# Altium PCB MB672.PCBDOC (part 4 of 4)
Units mil, origin at the board's own origin, x right, y up, seen from the top; angles counter-clockwise.
Board outline 4505 x 6805 mil, 4 copper layers (TopLayer, GND, VCC, BottomLayer); 337 components, 289 nets, 1516 pads, 621 vias.
Unrouted connection lines stored in the file: 28.
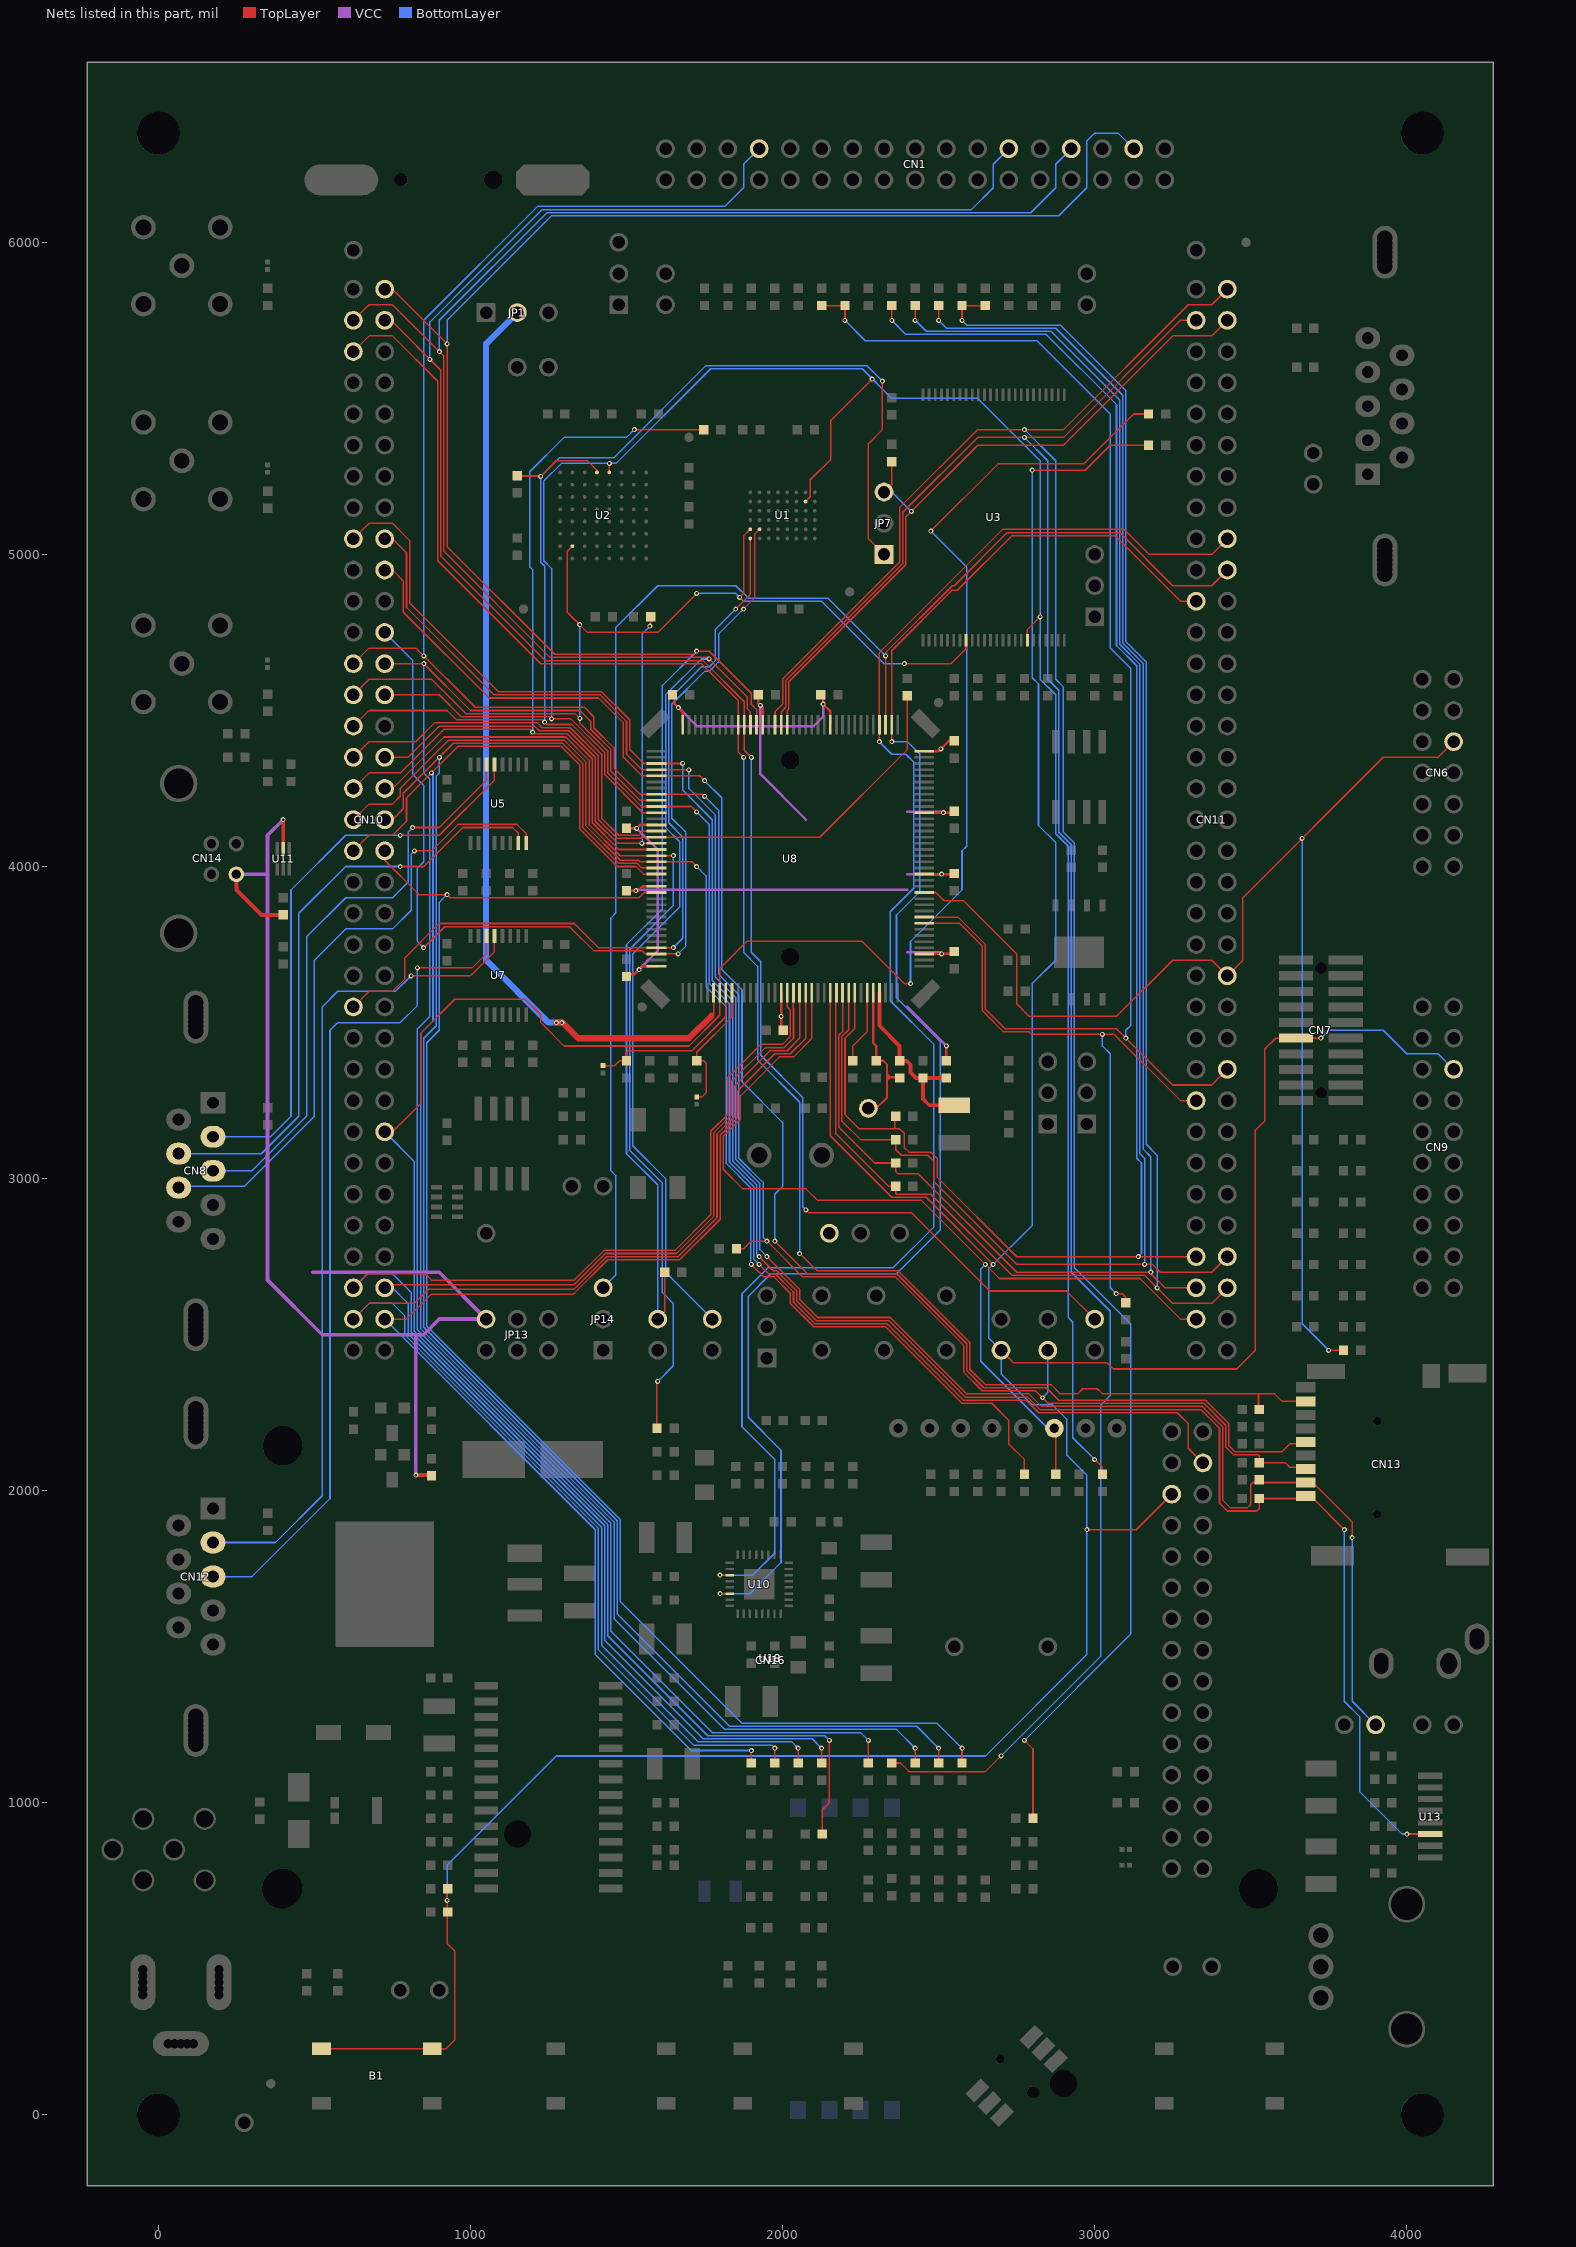
[diagram p6: the nets of this part, all layers, seen from the top]

## Via types
v1: diameter 16, hole 8, TopLayer to BottomLayer, tented both sides, 621 vias

## Nets (pads, with @x,y where several pads share a name; then routed paths per layer and width w, separated by ;. In a path a pad name is that pad's centre, name@x,y a point inside that pad or via, vN(x,y) a via of type N, cw(c..) or ccw(c..) an arc to the next point about the centre after c; other vN are vias at no path point) (continued)
PB13: CN11.21 U8.74 U10.14 | length 5093.3
  TopLayer w5: v1(1800,1670) 1800.47,1670.47 U10.14@1830.51,1670.47 ; v1(2350,4400) 2350,4453.94 U8.74@2349.8,4454.13 2349.8,4691.66 2543.14,4885 2560,4885 2735,5060 3065,5060 3275,4850 CN11.21@3325,4850
  BottomLayer w5: v1(1800,1670) 1895,1670 1995,1770 1995,2130 1890,2235 1890,2622.57 1962.43,2695 2365,2695 2505,2835 2505,3439.14 2365,3579.14 2365,3845 2440,3920 2440,4360 2400,4400 v1(2350,4400)
PB14: CN11.20 JP14.3 U8.75 | length 4735.2
  TopLayer w5: v1(2330,4675) 2330,4686 2544,4900 2550,4900 2720,5070 3080,5070 3250,4900 3375,4900 CN11.20@3425,4950 ; U8.75@2330.12,4454.13 v1@2330.12,4675
  BottomLayer w5: JP14.3@1425,2650 1465,2690 1465,3010 1450,3025 1450,3835 1465,3850 1465,4765 1600,4900 1850,4900 1890,4860 2145,4860 v1(2330,4675)
PB15: CN11.18 U8.76 U10.11 | length 5147.1
  TopLayer w5: v1(1799.53,1729.53) U10.11@1830.51,1729.53 ; v1(2310,4400) 2310,4453.7 U8.76@2310.43,4454.13 2310.43,4685.43 2705,5080 3095,5080 3175,5000 3375,5000 CN11.18@3425,5050
  BottomLayer w5: v1(1799.53,1729.53) 1904.53,1729.53 1975,1800 1975,2100 1870,2205 1870,2630.86 1954.14,2715 2355,2715 2485,2845 2485,3430 2345,3570 2345,3855 2420,3930 2420,4335 2395,4360 2350,4360 v1(2310,4400)
PC0: C7.2 CN11.66 R6.2 R63.2 U8.26 | length 5620
  TopLayer w5: U8.26@2170,3593.23 2170,3145 2340,2975 R63.2@2362.5,2975 2362.5,2952.5 2365,2950 2475,2950 2735,2690 3160,2690 3250,2600 3375,2600 CN11.66@3425,2650 ; v1(2575,5750) R6.2@2575,5797.5 C7.2@2650,5797.5
  BottomLayer w5: v1(2575,5750) 2590,5735 2890,5735 3100,5525 3100,4720.71 3165,4655.71 3165,3110 3200,3075 v1(3200,2650)
PC1: C22.2 CN11.65 R5.1 U8.27 | length 5397.5
  TopLayer w5: U8.27@2192.32,3595.87 2192.32,3471.46 2180,3459.14 2180,3165 2295,3050 C22.2@2362.5,3050 2362.5,3022.5 2370,3015 2435,3015 2750,2700 v1(3180,2700) 3180,2695 3225,2650 CN11.65@3325,2650 ; v1(2500,5750) R5.1@2500,5797.5
  BottomLayer w5: v1(2500,5750) 2525,5725 2875,5725 3090,5510 3090,4716.57 3155,4651.57 3155,3095 3180,3070 v1(3180,2700)
PC2: C13.2 CN11.64 R4.1 U8.28 | length 5545
  TopLayer w5: U8.28@2212.01,3595.87 2212.01,3477.01 2190,3455 2190,3185 2250,3125 C13.2@2362.5,3125 2362.5,3092.5 2380,3075 2465,3075 2485,3055 2485,2990 2750,2725 3185,2725 3210,2700 3375,2700 CN11.64@3425,2750 ; v1(2425,5750) R4.1@2425,5797.5
  BottomLayer w5: v1(2425,5750) 2460,5715 2860,5715 3080,5495 3080,4712.43 3145,4647.43 3145,3080 3160,3065 v1(3160,2725)
PC3: C9.2 CN11.63 R3.1 U8.29 | length 5463.1
  TopLayer w5: U8.29@2231.69,3595.87 2231.69,3481.69 2200,3450 2200,3205 2245,3160 2375,3160 2390,3145 2390,3100 2405,3085 2475,3085 2495,3065 2495,3005 2750,2750 CN11.63@3325,2750 ; v1(2350,5750) R3.1@2350,5797.5 ; 2360,3160 C9.2@2360,3197.5
  BottomLayer w5: v1(2350,5750) 2395,5705 2845,5705 3070,5480 3070,4708.28 3135,4643.28 3135,3065 3150,3050 3150,2760 v1(3140,2750)
PC4: CN11.53 R126.1 U8.44 | length 2132.1
  TopLayer w5: U8.44@2454.13,3818.31 2566.69,3818.31 2640,3745 2640,3538.28 2708.28,3470 2790,3470 2798,3462 3063,3462 3275,3250 CN11.53@3325,3250 ; v1(3068.5,2631.5) 3088.5,2631.5 3100,2620 R126.1@3100,2602.5 R126.1@3097.5,2602.5
  BottomLayer w5: v1(3025,3462) 3025,3425 3050,3400 3050,2650 v1(3068.5,2631.5)
PC5: C6.2 CN11.52 R1.2 U8.45 | length 4465.9
  TopLayer w5: R1.2@2125,5797.5 C6.2@2200,5797.5 v1(2200,5750) ; U8.45@2454.13,3837.99 2562.01,3837.99 2650,3750 2650,3542.43 2712.43,3480 3070,3480 3250,3300 3375,3300 CN11.52@3425,3350
  BottomLayer w5: v1(2200,5750) 2265,5685 2815,5685 3050,5450 3050,4700 3115,4635 3115,3490 3100,3475 v1(3100,3450)
PC6: CN1.3 CN10.2 JP15.1 R56.2 U8.96 | length 7269.3
  TopLayer w5: CN10.2@725,5850 750,5850 v1(925,5675) 925,5025 1270,4680 1715,4680 v1(1725,4690) 1765,4690 1900,4555 1900,4520 1916.73,4503.27 U8.96@1916.73,4454.13 ; JP15.1@1600,2550 1622.5,2572.5 R56.2@1622.5,2700
  BottomLayer w5: v1(925,5675) 925,5750 1260,6085 2885,6085 2975,6175 2975,6325 3000,6350 3075,6350 CN1.3@3125,6300 ; JP15.1@1600,2555 1600,2980 1500,3080 1500,3750 1615,3865 1615,4580 v1(1725,4690)
PC7: CN1.7 CN10.3 JP16.1 U8.97 | length 7033.7
  TopLayer w5: CN10.3@625,5750 675,5800 750,5800 915,5635 915,5010 1255,4670 1760,4670 1887.36,4542.64 1887.36,4505 1897.05,4495.32 U8.97@1897.05,4454.13
  BottomLayer w5: v1(900,5650) 900,5750 1245,6095 2795,6095 2875,6175 2875,6250 CN1.7@2925,6300 ; v1(1765,4665) 1740,4665 1625,4550 1625,4125 1670.44,4079.56 1670.44,3870.44 1520,3720 1520,3105 1625,3000 1625,2700 JP16.1@1775,2550
PC8: CN1.11 CN10.4 JP17.1 U8.98 | length 7035.5
  TopLayer w5: CN10.4@725,5750 745,5750 905,5590 905,4995 1240,4660 1745,4660 1877.36,4527.64 1877.36,4372.64 v1(1900,4350) ; v1(2075,2900) 2085,2890 2414.14,2890 2664.14,2640 2910,2640 JP17.1@3000,2550
  BottomLayer w5: v1(870,5625) 870,5745 1025,5900 1056.28,5931.28 1230,6105 2605,6105 2675,6175 2675,6250 CN1.11@2725,6300 ; v1(1900,4350) 1900,3725 1930,3695 1930,3395 2065,3260 2065,2910 v1(2075,2900)
PC9: CN10.5 CN13.8 R131.2 U8.99 | length 5857.6
  TopLayer w5: CN10.5@625,5650 675,5700 750,5700 895,5555 895,4980 1225,4650 1740,4650 1857.68,4532.32 1857.68,4367.32 v1(1875,4350) ; v1(2055,2760) 2110,2705 2370,2705 2600,2475 2600,2389.14 2649.14,2340 2860,2340 2890,2310 2945,2310 2961.84,2326.84 3008.16,2326.84 3025,2310 3576.22,2310 3600,2286.22 CN13.8@3676.65,2286.22 ; R131.2@3525,2262.5 3525,2310
  BottomLayer w5: v1(1875,4350) 1875,3725 1920,3680 1920,3380 2055,3245 v1(2055,2760)
PC10: CN10.17 CN13.1 R132.2 U8.111 U13.3 | length 6840
  TopLayer w5: CN10.17@625,5050 675,5100 750,5100 805,5045 805,4845 1090,4560 1420,4560 1510,4470 1510,4375.12 1555,4330.12 v1(1680.12,4330.12) ; v1(1925,2750) 1970,2705 1980.86,2705 2045,2640.86 2045,2608.28 2108.28,2545 2340,2545 2585,2300 2785,2300 2825,2260 3340,2260 3400,2200 3400,1960 3425,1935 3520,1935 3527.5,1942.5 R132.2@3527.5,1975 3700,1975 v1(3800,1875) ; v1(4000,900) 4074.8,900 U13.3@4075,899.8
  BottomLayer w5: v1(1680.12,4330.12) 1680.12,4244.88 1775,4150 1775,3635 1840,3570 1840,3056.72 1917.5,2979.22 1917.5,2757.5 v1(1925,2750) ; v1(3800,1875) 3800,1325 3850,1275 3850,1035 3985,900 v1(4000,900)
PC11: CN10.18 CN13.2 JP22.1 R133.2 U8.112 | length 6279.5
  TopLayer w5: CN10.18@725,5050 750,5050 795,5005 795,4830 1075,4550 1415,4550 1500,4465 1500,4360 1549.57,4310.43 1699.57,4310.43 v1(1700,4310) ; v1(1950,2750) 2055,2645 2055,2612.43 2112.43,2555 2345,2555 2590,2310 2790,2310 2830,2270 3345,2270 3410,2205 3410,1970 3435,1945 3490,1945 3500,1955 3500,2020 3506.38,2026.38 3698.62,2026.38 3825,1900 v1(3825,1850)
  BottomLayer w5: v1(1700,4310) 1700,4250 1785,4165 1785,3645 1850,3580 1850,3060.86 1927.5,2983.36 1927.5,2772.5 v1(1950,2750) ; v1(3825,1850) 3825,1325 JP22.1@3900,1250
PC12: CN10.20 CN13.5 U8.113 | length 5102.8
  TopLayer w5: CN10.20@725,4950 750,4950 785,4915 785,4815 1060,4540 1410,4540 1490,4460 1490,4350 1549.25,4290.75 1734.25,4290.75 v1(1750,4275) ; v1(1975,2800) 2080,2695 2365.86,2695 2590,2470.86 2590,2385 2645,2330 2845,2330 2885,2290 3355,2290 3430,2215 3430,2145 3450,2125 3600,2125 3625,2150 CN13.5@3680,2150
  BottomLayer w5: v1(1750,4275) 1805,4220 1805,3670 1870,3605 1870,3310 2000,3180 2000,2975 1975,2950 v1(1975,2800)
PC13: CN10.56 R11.1 R111.2 U8.7 | length 7846.4
  TopLayer w5: CN10.56@725,3150 750,3150 840,3240 840,3465 950,3575 1175,3575 1225,3525 1225,3500 1300,3425 1700,3425 1798.62,3523.62 1798.62,3673.62 1885,3760 2255,3760 2390,3625 v1(2410,3625) ; R111.2@2127.5,900 2127.5,977.5 2150,1000 v1(2150,1200) ; v1(2475,5075) 2690,5290 2965,5290 3125,5450 R11.1@3172.5,5450
  BottomLayer w5: CN10.56@725,3150 820,3055 820,2511.57 1440,1891.57 1440,1535 1760,1215 2135,1215 v1(2150,1200) ; v1(2410,3625) 2410,3760 2575,3925 2575,4050 2590,4065 2590,4960 v1(2475,5075)
PC14: JP9.1 R135.2 U8.8 | length 551.8
  TopLayer w5: JP9.1@1425,3361.81 1461.81,3361.81 1477.5,3377.5 R135.2@1500,3377.5 1500,3405 1505,3410 1710,3410 1818.31,3518.31 U8.8@1818.31,3595.87
PC15: JP10.2 R39.2 U8.9 | length 428.7
  TopLayer w5: JP10.2@1725,3261.81 1741.81,3261.81 1755,3275 1755,3370 1747.5,3377.5 R39.2@1725,3377.5 1725,3405 1837.99,3517.99 U8.9@1837.99,3595.87
PD2: C60.2 CN1.27 CN10.25 CN13.3 JP20.1 R134.2 U8.116 | length 7723.2
  TopLayer w5: CN10.25@625,4650 675,4700 825,4700 1015,4510 1365,4510 1395,4480 1395,4445 1460,4380 1460,4315 1543.31,4231.69 1743.31,4231.69 v1(1750,4225) ; C60.2@1852.5,2775 1875,2775 1900,2800 v1(1950,2800) 2065,2685 2361.72,2685 2580,2466.72 2580,2380 2640,2320 2810.74,2320 2850.74,2280 3350,2280 3420,2210 3420,2140 3445,2115 3525,2115 3527.5,2112.5 R134.2@3527.5,2090 3610,2090 3625,2075 CN13.3@3670,2075
  BottomLayer w5: v1(850.35,4674.65) 850.35,5750.35 1215,6115 1815,6115 1875,6175 1875,6250 CN1.27@1925,6300 ; v1(1750,4225) 1795,4180 1795,3655 1860,3590 1860,3065 1937.5,2987.5 1937.5,2812.5 v1(1950,2800) ; v1(2832.87,2297.87) 2850,2315 JP20.1@2850,2450
PD3: CN10.26 R100.2 U8.117 | length 5532.8
  TopLayer w5: CN10.26@725,4650 v1@850,4650 ; v1(850.35,4650.35) v1@850,4650 ; U8.117@1595.87,4212.01 1542.99,4212.01 1450,4305 1450,4375 1385,4440 1385,4465 1350,4500 1000,4500 v1@850,4650 ; R100.2@2275,1127.5 v1(2275,1200)
  BottomLayer w5: v1(850.35,4650.35) 850.35,4299.65 870,4280 870,3520 830,3480 830,2515.71 1450,1895.71 1450,1550 1775,1225 2250,1225 v1(2275,1200)
PD4: CN10.27 CN16.4 U1.A2 U2.G2 U3.8 U8.118 | length 6877.7
  TopLayer w5: CN10.27@625,4550 675,4600 875,4600 985,4490 1335,4490 v1(1350.36,4474.64) 1350.36,4459.64 1440,4370 1440,4300 1547.68,4192.32 1707.68,4192.32 v1(1725,4175) ; U2.G2@1326.57,5026.57 1310,5010 1310,4815 1375,4750 1600,4750 v1(1725,4875) ; v1(1862.61,4862.39) 1875,4874.78 1875,5059.06 U1.A2@1896.65,5080.71 ; v1(1925,2725) 1955,2695 1976.72,2695 2035,2636.72 2035,2604.14 2104.14,2535 2335,2535 2580,2290 2780.86,2290 2820.86,2250 3265,2250 3300,2215 3300,2136 CN16.4@3347,2089 ; v1(2390,4650) 2540,4650 2587.8,4697.8 U3.8@2587.8,4725
  BottomLayer w5: v1@1350,4475 v1(1350,4775) ; v1(1725,4175) 1765,4135 1765,3625 1830,3560 1830,3052.57 1907.5,2975.07 1907.5,2742.5 v1(1925,2725) ; v1(1725,4875) 1850,4875 1875,4850 2125,4850 2325,4650 v1(2390,4650)
PD5: CN10.28 R80.1 U1.G5 U2.A5 U3.18 U8.119 | length 7633.3
  TopLayer w5: CN10.28@725,4550 900,4550 970,4480 1253,4480 v1(1260,4473) 1322,4473 1430,4365 1430,4295 1552.36,4172.64 U8.119@1595.87,4172.64 ; U2.A5@1444.68,5262.8 v1@1444.68,5291.21 ; U1.G5@2073.82,5169.29 2089,5184.47 2089,5239 2155,5305 2155,5430 v1(2286.99,5561.99) ; U3.18@2784.65,4725 2784.65,4759.65 v1(2825,4800) ; v1(3000,2100) 3025,2075 R80.1@3025,2052.5
  BottomLayer w5: v1(1260,4473) 1260,4955 1235,4980 1235,5235 1291.52,5291.52 1466.52,5291.52 1770,5595 2255,5595 2350,5500 2625,5500 2825,5300 2825,4600 2875,4550 2875,4105 2915,4065 2915,2555 2930,2540 2930,2170 v1(3000,2100)
  other v1: 1445,5291.52
PD6: CN10.29 JP7.1 R18.1 U2.A4 U8.122 | length 4225.9
  TopLayer w5: CN10.29@625,4450 675,4500 925,4500 955,4470 1230,4470 1245,4455 1325,4455 1420,4360 1420,4155 1475,4100 1540,4100 1553.58,4113.58 U8.122@1595.87,4113.58 ; R18.1@1151.14,5251.36 v1@1223.64,5251.36 ; v1(1225,5250) 1275,5300 1375,5300 1405.31,5269.69 U2.A4@1405.31,5262.8 ; v1(2320,5555) 2320,5400 2275,5355 2275,5050 JP7.1@2325,5000
  BottomLayer w5: v1(1237.61,4462.39) 1237.61,4962.39 1225,4975 v1(1225,5250) 1285,5310 1460,5310 1755,5605 2270,5605 v1(2320,5555)
PD7: CN10.31 R22.1 U8.123 | length 2384.5
  TopLayer w5: CN10.31@625,4350 675,4400 825,4400 885,4460 1215,4460 1230,4445 1320,4445 1410,4355 1410,4150 1470,4090 1550,4090 1553.9,4093.9 2118.9,4093.9 2400,4375 R22.1@2400,4547.5
PE0: CN10.47 U1.A1 U8.141 | length 2673.6
  TopLayer w5: CN10.47@625,3550 675,3600 750,3600 790,3640 790,3708 899.36,3817.36 1332.64,3817.36 1410.43,3739.57 U8.141@1595.87,3739.57 1596.3,3740 v1(1650,3740) ; v1(1850,4825) 1896.65,4871.65 U1.A1@1896.65,5051.18
  BottomLayer w5: v1(1650,3740) 1680.44,3770.44 1680.44,4094.56 1635,4140 1635,4535 1740,4640 1765,4640 1785,4660 1785,4760 v1(1850,4825)
PE1: CN10.24 U1.B2 U8.142 | length 3472.9
  TopLayer w5: v1(850,3740) 917.36,3807.36 1317.64,3807.36 1395.43,3729.57 1550.43,3729.57 1560.12,3719.88 v1(1665,3719.88) ; v1(1875,4825) 1910.47,4860.47 1910.47,5065 U1.B2@1926.18,5080.71
  BottomLayer w5: CN10.24@725,4750 815,4660 815,4295 850,4260 850,4015 830,3995 830,3760 v1(850,3740) ; v1(1665,3719.88) 1690.44,3745.33 1690.44,4109.56 1645,4155 1645,4520 1750,4625 1765,4625 1795,4655 1795,4745 v1(1875,4825)
PF6: CN10.65 R96.2 U8.18 | length 4606.2
  TopLayer w5: CN10.65@625,2650 670,2695 855,2695 875,2675 1332.57,2675 1427.57,2770 1655,2770 1770,2885 1770,3151.57 1825,3206.57 1825,3325 1930,3430 2000,3430 2025,3455 2025,3540 2015.16,3549.84 U8.18@2015.16,3595.87 ; R96.2@2125,1127.5 v1(2125,1175)
  BottomLayer w5: CN10.65@625,2650 670,2695 750,2695 810,2635 810,2507.43 1430,1887.43 1430,1520 1745,1205 2095,1205 v1(2125,1175)
PF7: CN10.66 R97.2 U8.19 | length 4268.7
  TopLayer w5: CN10.66@725,2650 735,2660 1331.72,2660 1431.72,2760 1660,2760 1780,2880 1780,3147.43 1835,3202.43 1835,3310 1945,3420 2005,3420 2035,3450 2035,3545 2034.84,3545.16 U8.19@2034.84,3595.87 ; R97.2@2050,1127.5 v1(2050,1175)
  BottomLayer w5: CN10.66@725,2650 750,2650 800,2600 800,2503.28 1420,1883.28 1420,1505 1730,1195 2030,1195 v1(2050,1175)
PF8: CN10.67 R98.2 U8.20 | length 4434.3
  TopLayer w5: CN10.67@625,2550 675,2600 820,2600 865,2645 1330.86,2645 1435.86,2750 1665,2750 1790,2875 1790,3143.28 1845,3198.28 1845,3295 1960,3410 2015,3410 2054.53,3449.53 U8.20@2054.53,3595.87 ; R98.2@1975,1127.5 v1(1975,1175)
  BottomLayer w5: CN10.67@625,2550 675,2600 750,2600 790,2560 790,2499.14 1410,1879.14 1410,1490 1715,1185 1965,1185 v1(1975,1175)
PF9: CN10.68 R99.2 U8.21 | length 4098.3
  TopLayer w5: CN10.68@725,2550 795,2550 875,2630 1330,2630 1440,2740 1670,2740 1800,2870 1800,3139.14 1855,3194.14 1855,3280 1975,3400 2025,3400 2074.21,3449.21 U8.21@2074.21,3595.87 ; R99.2@1900,1127.5 v1(1900,1167.52)
  BottomLayer w5: CN10.68@725,2550 1400,1875 1400,1475 1707.48,1167.52 v1(1900,1167.52)
PF10: CN11.67 R78.1 U8.22 U18.6 | length 3208.5
  TopLayer w5: U8.22@2093.9,3595.87 2093.9,3448.9 2035,3390 1990,3390 1865,3265 1865,3190 1810,3135 1810,3030 1872.93,2967.07 2075.36,2967.07 2112.43,2930 2445,2930 2695,2680 3145,2680 3275,2550 CN11.67@3325,2550 ; R78.1@2875,2052.5 U18.6@2875,2196.06
  BottomLayer w5: v1(2650,2725) 2635,2710 2635,2415 2850,2200 U18.6@2871.06,2200
PF11: CN6.9 CN11.46 R129.1 U8.49 | length 4198.7
  TopLayer w5: U8.49@2454.13,3916.73 2490.94,3916.73 2502.65,3905.03 ; 2503.36,3904.32 2517.68,3890 2580,3890 2750,3720 2750,3560 2790,3520 3070,3520 3250,3700 3375,3700 CN11.46@3425,3650 3475,3700 3475,3900 3925,4350 4100,4350 CN6.9@4150,4400 ; v1(3750,2450) R129.1@3797.5,2450
  BottomLayer w5: v1(3665,4090) 3665,2535 v1(3750,2450)
PG6: CN11.4 JP7.3 R17.1 U8.91 | length 2335.5
  TopLayer w5: U8.91@2015.16,4454.13 2015.16,4500.16 2020,4505 2020,4591.72 2395,4966.72 2395,5120 2625,5350 2900,5350 3250,5700 3375,5700 CN11.4@3425,5750 ; JP7.3@2325,5200 2350,5225 R17.1@2350,5297.5
  BottomLayer w5: JP7.3@2325,5200 2350,5200 2412.38,5137.62 v1(2412.62,5137.62)
PG7: CN11.3 R101.2 U8.92 | length 6902.9
  TopLayer w5: U8.92@1995.47,4454.13 1995.47,4495.47 2010,4510 2010,4595.86 2385,4970.86 2385,5135 2625,5375 2900,5375 3275,5750 CN11.3@3325,5750 ; R101.2@2350,1127.5 2377.5,1127.5 2405,1100 2650,1100 v1(2700,1150)
  BottomLayer w5: v1(2700,1150) 3020,1470 3020,2275 3050,2305 3050,2575 2925,2700 2925,4070 2885,4110 2885,4565 2850,4600 2850,5300 v1(2775,5375)
PG8: CN11.2 R106.2 U8.93 | length 6944.2
  TopLayer w5: U8.93@1975.79,4454.13 1975.79,4495.79 2000,4520 2000,4600 2375,4975 2375,5150 2625,5400 2900,5400 3300,5800 3375,5800 CN11.2@3425,5850 ; v1(2775,1200) 2802.5,1172.5 R106.2@2802.5,950
  BottomLayer w5: v1(2775,1200) 3115,1540 3115,2535 2935,2715 2935,4075 2900,4110 2900,4575 2875,4600 2875,5300 v1(2775,5400)
PG9: CN10.32 R21.1 U8.124 | length 1923.5
  TopLayer w5: CN10.32@725,4350 800,4350 900,4450 1205,4450 1220,4435 1315,4435 1400,4350 1400,4145 1470.79,4074.21 v1@1548,4074.21 ; v1@1548.88,4074.21 U8.124@1595.87,4074.21 ; v1(1575,4770) 1577.5,4772.5 R21.1@1577.5,4800
  BottomLayer w5: v1@1550,4075 1550,4745 v1(1575,4770)
  other v1: 1548.88,4073.88
PG10: CN10.33 R15.1 U8.125 | length 2781.3
  TopLayer w5: CN10.33@625,4250 675,4300 775,4300 915,4440 1190,4440 1205,4425 1310,4425 1390,4345 1390,4140 1475.47,4054.53 U8.125@1595.87,4054.53 ; v1(1525,5400) R15.1@1747.5,5400
  BottomLayer w5: v1(1199.04,4430.96) 1200,4431.92 1200,4950 1190,4960 1190,5265 1300,5375 1500,5375 v1(1525,5400)
PG11: CN10.34 R128.2 U8.126 | length 3243.7
  TopLayer w5: CN10.34@725,4250 750,4250 915,4415 1305,4415 1380,4340 1380,4135 1480.16,4034.84 U8.126@1595.87,4034.84 1596.02,4035 v1(1650,4035) ; R128.2@1597.5,2200 1597.5,2347.5 v1(1600,2350)
  BottomLayer w5: v1(1600,2350) 1650,2400 1650,2600 1615,2635 1615,2985 1510,3090 1510,3735 1650,3875 v1(1650,4035)
PG12: CN10.35 R77.1 U8.127 | length 4100
  TopLayer w5: CN10.35@625,4150 675,4200 750,4200 775,4225 775,4250 930,4405 1300,4405 1370,4335 1370,4130 1480,4020 1538.28,4020 1543.13,4015.16 1709.84,4015.16 v1(1725,4000) ; v1(1900,2725) 1940,2685 1972.57,2685 2025,2632.57 2025,2600 2100,2525 2330,2525 2575,2280 2670,2280 2725,2225 2725,2150 2775,2100 R77.1@2775,2052.5
  BottomLayer w5: v1(1725,4000) 1755,3970 1755,3615 1820,3550 1820,3048.43 1897.5,2970.93 1897.5,2727.5 v1(1900,2725)
PG13: CN10.36 R103.2 U8.128 | length 5565.3
  TopLayer w5: CN10.36@725,4150 750,4150 785,4185 785,4235 945,4395 1295,4395 1360,4330 1360,4125 1475,4010 1534.14,4010 1548.67,3995.47 U8.128@1595.87,3995.47 ; R103.2@2500,1127.5 v1(2500,1175)
  BottomLayer w5: v1(900,4350) 900,4300 890,4290 890,3490 850,3450 850,2524 1470,1904 1470,1605 1830,1245 2430,1245 v1(2500,1175)
PG14: CN10.37 R102.2 U8.129 | length 5613
  TopLayer w5: CN10.37@625,4050 675,4100 750,4100 795,4145 795,4220 960,4385 1290,4385 1350,4325 1350,4120 1470,4000 1530,4000 1554.21,3975.79 U8.129@1595.87,3975.79 ; R102.2@2425,1127.5 v1(2425,1175)
  BottomLayer w5: v1(875,4300) 880,4295 880,3505 840,3465 840,2519.85 1460,1899.85 1460,1590 1815,1235 2365,1235 v1(2425,1175)
PG15: CN10.38 R104.2 U8.132 | length 4843.4
  TopLayer w5: CN10.38@725,4050 725,4020 835,3910 v1(925,3910) 935,3900 1540,3900 1556.73,3916.73 U8.132@1595.87,3916.73 ; R104.2@2575,1127.5 v1(2575,1175)
  BottomLayer w5: v1(925,3910) 900,3885 900,3475 860,3435 860,2528.14 1480,1908.14 1480,1645 1870,1255 2495,1255 v1(2575,1175)
RESET#: B1.2 B1.3 C94.2 CN7.10 CN9.15 CN16.5 JP19.2 R14.2 R119.1 U8.25 | length 11857.3
  TopLayer w5: B1.2@522.83,212.5 922.5,212.5 950,240 950,525 925,550 R119.1@925,722.5 ; U8.25@2152.95,3595.87 2152.95,3137.05 2350,2940 2460,2940 v1(2675,2725) ; JP19.2@2700,2450 2740,2410 3039.85,2410 3059.85,2390 3455,2390 3515,2450 3515,3155 3545,3185 3545,3415 3580,3450 v1(3725,3450) ; v1(2800,5270) 2970,5270 3050,5350 R14.2@3172.5,5350 ; v1(2975,1875) 3133,1875 CN16.5@3247,1989
  BottomLayer w5: v1(925,687.5) 925,800 1275,1150 2650,1150 2975,1475 2975,2050 2910,2115 2910,2230 2865,2275 2800,2275 2700,2375 JP19.2@2700,2450 2660,2490 2660,2710 2800,2850 2800,3625 2875,3700 2875,4076.72 2820,4131.72 2820,4585 2800,4605 v1(2800,5270) ; v1(3725,3450) 3750,3475 3925,3475 4000,3400 4100,3400 CN9.15@4150,3350
RS232_CTS2: CN8.8 U5.8 | length 2031.4
  TopLayer w5: v1(820,4050) 875,4050 960,4135 1149.13,4135 1179.13,4105 U5.8@1179.13,4075
  BottomLayer w5: CN8.8@69,2975 275,2975 500,3200 500,3700 600,3800 750,3800 810,3860 810,4040 v1(820,4050)
RS232_RTS2: CN8.7 U5.7 | length 1941.3
  TopLayer w5: v1(775,4000) 850,4000 975,4125 1135,4125 1153.54,4106.46 U5.7@1153.54,4075
  BottomLayer w5: CN8.7@65,3080 330,3080 450,3200 450,3850 600,4000 v1(775,4000)
RS232_RX1: CN12.2 U7.13 | length 2653.3
  TopLayer w5: v1(810,3650) 1000,3650 1076.77,3726.77 U7.13@1076.77,3776.97
  BottomLayer w5: CN12.2@175,1834 375,1834 525,1984 525,3550 575,3600 760,3600 v1(810,3650)
RS232_RX2: CN8.2 U5.13 | length 1850
  TopLayer w5: v1(775,4100) 900,4100 1076.77,4276.77 U5.13@1076.77,4326.97
  BottomLayer w5: CN8.2@175,3134 359,3134 425,3200 425,3925 600,4100 v1(775,4100)
RS232_TX1: CN12.3 U7.14 | length 2707.8
  TopLayer w5: v1(830,3675) 1005,3675 1051.18,3721.18 U7.14@1051.18,3776.97
  BottomLayer w5: CN12.3@175,1725 300,1725 550,1975 550,3475 575,3500 775,3500 830,3555 v1(830,3675)
RS232_TX2: CN8.3 U5.14 | length 1875.8
  TopLayer w5: v1(815,4125) 900,4125 1051.18,4276.18 U5.14@1051.18,4326.97
  BottomLayer w5: CN8.3@175,3025 300,3025 475,3200 475,3775 600,3900 750,3900 800,3950 800,4110 v1(815,4125)
U5V: C74.2 CN14.1 JP13.2 R70.1 U11.5 | length 3830.4
  TopLayer w12: CN14.1@250,3975 250,3925 330,3845 C74.2@400,3845 ; U11.5@400,4056.3 v1(400,4150) ; v1(825,2050) R70.1@872.5,2050
  VCC w12: CN14.1@250,3975 350,3975 ; v1(400,4150) 350,4100 350,2675 525,2500 850,2500 900,2550 JP13.2@1050,2550 900,2700 495,2700 ; v1(825,2050) 825,2500
VBAT: JP1.2 U8.6 | length 3066
  TopLayer w5: 1772.54,3522.54 1778.94,3528.94 U8.6@1778.94,3595.87
  TopLayer w20: v1(1275,3500) 1295,3500 1345,3450 1700,3450 1772.54,3522.54
  BottomLayer w20: JP1.2@1150,5775 1050,5675 1050,3700 1250,3500 v1(1292.5,3500)
VDD: C17.1 C18.1 C19.1 C23.1 C25.1 C26.1 C32.1 C33.1 C35.1 C36.1 C38.1 JP12.1 L1.2 U8.17 U8.39 U8.52 U8.62 U8.72 U8.84 U8.95 U8.108 U8.121 U8.131 U8.144 | length 4043.7
  TopLayer w8: C35.1@1495,3655 1525,3655 1550.51,3680.51 U8.144@1595.87,3680.51 ; C32.1@1500,3922.5 1537.5,3922.5 1551.42,3936.42 U8.131@1595.87,3936.42 ; C25.1@1500,4122.5 v1(1532.5,4122.5) 1543.27,4133.27 U8.121@1595.87,4133.27 ; C17.1@1655,4550 1655,4520 1680.51,4494.49 U8.108@1680.51,4454.13 ; C18.1@1922.5,4550 1922.5,4522.5 1936.42,4508.58 U8.95@1936.42,4454.13 ; C38.1@1995.47,3470.47 U8.17@1995.47,3595.87 ; C19.1@2130,4550 v1(2130,4520) 2152.95,4497.05 U8.84@2152.95,4454.13 ; U8.39@2454.13,3719.88 C36.1@2542.38,3719.88 ; U8.52@2454.13,3975.79 C33.1@2548.29,3975.79 ; U8.62@2454.13,4172.64 C26.1@2547.36,4172.64 ; U8.72@2454.13,4369.49 2499.49,4369.49 2532.5,4402.5 C23.1@2550,4402.5 ; L1.2@2525,3377.5 v1(2525,3425)
  VCC w8: v1(1530,3922.5) 1532.5,3925 2400,3925 ; v1(1532.5,4122.5) 1600,4055 1600,3730 v1(1540,3670) ; v1(1666.09,4508.91) 1725,4450 2100,4450 2130,4480 v1(2130,4520) ; v1(1928.95,4516.05) 1928.95,4296.05 2075,4150 ; 2400,3550 v1(2525,3425) ; 2400,3725 2504.88,3725 v1(2510,3719.88) ; 2400,3975 2509.21,3975 v1(2510,3975.79) ; 2400,4175 2512.64,4175 v1(2515,4172.64)
  other v1: 1995.47,3519.53 2506.86,4376.86
VDDA: C46.2 C50.1 L1.1 R42.2 U8.33 | length 608.3
  TopLayer w12: U8.33@2310.43,3595.87 2310.43,3489.57 2375,3425 R42.2@2375,3377.5 2397.5,3377.5 2410,3365 2410,3340 2427.5,3322.5 L1.1@2525,3322.5 ; C46.2@2450,3322.5 2450,3255 2470,3235 C50.1@2550,3235
VREF+: C45.1 R42.1 TP3.1 U8.32 | length 520.2
  TopLayer w7: TP3.1@2275,3225 2300,3225 2335,3260 2335,3365 2322.5,3377.5 C45.1@2300,3377.5 2300,3425 2290.75,3434.25 U8.32@2290.75,3595.87 ; 2335,3315 2345,3325 2335,3335 ; 2335,3325 R42.1@2385,3325
VREF-: R41.1 U8.31 | length 237.4
  TopLayer w5: R41.1@2225,3377.5 2225,3425 2271.06,3471.06 U8.31@2271.06,3595.87
pads on no net: BT1.0 CN4.1 CN4.4 CN4.8 CN6.12 CN7.0 CN7.7 CN8.9 CN10.11 CN11.38 CN11.48 CN11.49 CN11.62 CN11.68 CN12.9 CN13.0 CN16.0 CN18.6 CN18.G0 R51.2 U1.A6 U1.E3 U1.G2 U1.H6 U2.A1 U2.A8 U2.B1 U2.C1 U2.C8 U2.D1 U2.E1 U2.F8 U2.G1 U2.G8 U2.H1 U2.H8 U4.5 U6.0 U7.7 U7.8 U7.9 U8.0 U8.106 U10.0 U10.1 U10.5 U10.12 U10.26 U10.27 U10.28 U10.29 U10.30 U13.2 U17.10 U17.25 U18.0 U19.0 X2.2 X2.3
copper on no net: | length 12020
  TopLayer w5: -225,2200 -100,2200 ; -225,2325 -100,2325 25,2325 ; -225,2450 -100,2450 25,2450 ; -120,2200 25,2200 ; -100,1950 -100,2075 ; -100,2700 -100,2575 ; -225,2075 -225,1950 25,1950 25,2075 ; -225,2075 -100,2075 ; -225,2075 -225,2575 ; -225,2575 -225,2700 20,2700 25,2700 25,2575 ; -225,2575 -100,2575 ; -100,2075 -100,2575 ; -100,2075 25,2075 ; -100,2575 25,2575 ; 25,2075 25,2575
  VCC w5: -225,2075 25,2075 ; -225,2200 25,2200 ; -225,2325 25,2325 ; -225,2450 25,2450 ; -100,1950 -100,2575 -100,2700 ; -225,2575 -225,2700 25,2700 25,2575 ; -225,2575 -225,1950 25,1950 25,2575 ; -225,2575 25,2575
  BottomLayer w5: -225,2200 -100,2200 25,2200 ; -225,2325 -100,2325 25,2325 ; -225,2450 -100,2450 25,2450 ; -100,1950 -100,2075 ; -100,2700 -100,2575 ; -225,2075 -225,1950 25,1950 25,2075 ; -225,2075 -100,2075 ; -225,2075 -225,2575 ; -225,2575 -225,2700 25,2700 25,2575 ; -225,2575 -100,2575 ; -100,2075 -100,2575 ; -100,2075 25,2075 ; -100,2575 25,2575 ; 25,2075 25,2575

## Polygon pours and split planes (outlines as drawn)
GND on TopLayer (hatched 90Degree grid 20 track 10, remove dead copper): -210,6560 4290,6560 4290,-240 -210,-240
NetC78_2 on TopLayer (hatched 90Degree grid 10 track 15, remove dead copper): -225,4475 250,4475 250,3725 -225,3725
+3V3 on VCC (hatched 90Degree grid 10 track 15, remove dead copper): -225,6575 4275,6575 4275,-225 -225,-225
+5V on VCC (hatched 90Degree grid 10 track 15, remove dead copper): 1925,6300 1925,6575 4275,6575 4275,-225 -225,-225 -225,895 450,895 635,1080 635,1660 1000,2025 1000,2490.05 1275,2490.05 1275,1925 1125,1775 1025,1775 975,1725 975,1375 1025,1325 1025,1025 775,775 775,400 1225,-50 3475,-50 4075,550 4075,1150 3900,1325 3900,2275 4200,2575 4200,3850 4150,3900 4025,3900 4025,4100 4150,4100 4150,5950 3875,6225 1920,6225 1920,6340
E5V on VCC (hatched 90Degree grid 10 track 15, remove dead copper): -220,775 400,775 650,1025 650,1650 1025,2025 1025,2425 1050,2450 1270,2450 1270,2625 815,2625 815,2000 500,1685 500,1200 375,1075 -225,1075 -225,775
D5V on VCC (hatched 90Degree grid 10 track 15, remove dead copper): 1060,2510 1200,2510 1200,2795 1050,2945 930,2945 900,2975 900,3400 825,3475 700,3475 625,3550 625,5850 775,6000 3000,6000 3125,5875 3125,4875 3400,4875 3400,5900 3105,6195 580,6195 475,6090 475,2795 565,2705 930,2705 1050,2585 1050,2515
U5V on VCC (hatched 90Degree grid 10 track 15, remove dead copper): 225,4200 450,4200 450,2800 500,2750 925,2750 1100,2575 1100,2525 950,2525 880,2455 515,2455 350,2620 250,2720 225,2745
VDD on VCC (hatched 90Degree grid 10 track 10, remove dead copper): 2200,2795 2200,3320 2225,3345 2600,3345 2600,4425 2575,4450 2375,4450 2245,4580 1475,4580 1475,3270 1885,2860 1970,2775 2200,2775
GND on BottomLayer (hatched 90Degree grid 20 track 10, remove dead copper): -230,6575 4275,6575 4275,-225 -225,-225 -225,6575

## Keep-outs
KeepOutLayer:
  lines w4: -225,1950 -225,2075 ; -225,2200 -100,2200 25,2200 ; -225,2325 -100,2325 25,2325 ; -225,2450 -100,2450 25,2450 ; -100,1950 -100,2075 ; 25,1950 25,2075 ; -225,2075 -100,2075 ; -225,2075 -225,2575 -100,2575 ; -100,2075 25,2075 ; -100,2075 -100,2575 ; -100,2575 25,2575 25,2075
  lines w5: -225,1950 25,1950 ; -225,-225 -225,6575 4275,6575 4275,2361.13 ccw(c5430.29,2115.57) 4275,1870 4275,-225 -225,-225

## Other copper
TopLayer:
  text "1" at -125,2125 h50 r90
  text "D" at -15,2115 h50 r90
VCC:
  text "3" at -125,2410 h50 r90
  text "D" at -15,2410 h50 r90
BottomLayer:
  text "4" at -125,2535 h50 r90
  text "D" at -15,2535 h50 r90
GND (plane layer: these items are gaps in the copper):
  rectangle: -250,2325 50,2725
  region: -225,2200 -225,2325 -250,2325 -250,2200
  region: 50,2200 50,2325 25,2325 25,2200
  region: 50,1930 50,2200 -250,2200 -250,1930
  lines w4: -225,1950 -225,2075 ; -225,2200 -105,2200 ; -225,2325 -100,2325 25,2325 ; -225,2450 -100,2450 25,2450 ; -105,2075 -100,2075 ; -100,1950 -100,2075 ; -100,2200 25,2200 ; 25,1950 25,2075 ; -225,2075 -100,2075 ; -225,2075 -225,2575 -100,2575 ; -100,2075 -100,2575 ; -100,2075 25,2075 ; -100,2575 25,2575 25,2075
  text "2" at -125,2245 h50 r90
  text "D" at -15,2245 h50 r90

## Silkscreen, mask and mechanical layers (free items; w line width, h text height)
TopOverlay:
  drawing of 6002 lines, arcs and shapes, not listed
  text "Motor control" at 2100,6445 h40
  text "1" at 3220,6440 h35
  text "ADC123_11" at 100,6165 h35
  text "GND" at 475,5995 h35
  text "GND" at 3170,5970 h35
  text "CAN" at 3755,5945 h40 r90
  text "1" at 560,5920 h35
  text "2" at 700,5920 h35
  text "1" at 3270,5920 h35
  text "2" at 3400,5920 h35
  text "USART2_CTS" at 1415,5880 h35 r90
  text "GND" at 445,5825 h35
  text "PC6" at 785,5825 h35
  text "GND" at 3150,5825 h35
  text "PG8" at 3485,5825 h35
  text "1" at 1545,5775 h35
  text "1" at 960,5750 h35
  text "MC_EnA" at 1716,5750 h35 r90
  text "MC_Stop" at 3080,5750 h35 r90
  text "PC7" at 445,5725 h35
  text "PC8" at 785,5725 h35
  text "PG7" at 3150,5725 h35
  text "PG6" at 3485,5725 h35
  text "VBAT" at 1025,5680 h35
  text "3V3" at 1175,5680 h35
  text "MC_EnA" at 1410,5675 h35 r90
  text "PC9" at 445,5625 h35
  text "PA8" at 785,5625 h35
  text "PG5" at 3150,5625 h35
  text "PG4" at 3485,5625 h35
  text "ADC123_12" at 100,5545 h35
  text "WP" at 1000,5545 h35
  text "PG3" at 3150,5535 h35
  text "PA9" at 445,5525 h35
  text "PA10" at 785,5525 h35
  text "PG2" at 3485,5525 h35
  text "PC13" at 3150,5480 h35
  text "PA0" at 445,5425 h35
  text "GND" at 790,5425 h35
  text "GND" at 3485,5425 h35
  text "RST" at 3150,5380 h35
  text "PA11" at 790,5325 h35
  text "PD13" at 3485,5325 h35
  text "PA12" at 445,5225 h35
  text "PA13" at 785,5225 h35
  text "PD12" at 3150,5225 h35
  text "PD11" at 3485,5225 h35
  text "PA14" at 445,5125 h35
  text "PA15" at 785,5125 h35
  text "PD10" at 3150,5125 h35
  text "PD9" at 3485,5125 h35
  text "CAN" at 3650,5125 h35
  text "PC10" at 445,5025 h35
  text "PC11" at 785,5025 h35
  text "PD8" at 3150,5025 h35
  text "PB15" at 3485,5025 h35
  text "1" at 2400,4975 h35
  text "NAND_RB" at 2265,4950 h35 r90
  text "GND" at 445,4925 h35
  text "PC12" at 785,4925 h35
  text "D5V" at 3150,4925 h35
  text "PB14" at 3485,4925 h35
  text "ADC123_13" at 100,4890 h35
  text "PD0" at 450,4825 h35
  text "PD1" at 785,4825 h35
  text "PB13" at 3150,4825 h35
  text "PB12" at 3485,4825 h35
  text "CAN speed" at 3100,4750 h35 r90
  text "PE2" at 450,4725 h35
  text "PE1" at 785,4725 h35
  text "PB11" at 3150,4725 h35
  text "PB10" at 3485,4725 h35
  text "1" at 2980,4700 h35
  text "PD2" at 450,4625 h35
  text "PD3" at 785,4625 h35
  text "PE15" at 3150,4625 h35
  text "PE14" at 3485,4625 h35
  text "PD4" at 450,4525 h35
  text "PD5" at 785,4525 h35
  text "PE13" at 3150,4525 h35
  text "PE12" at 3485,4525 h35
  text "PD6" at 450.1,4425.1 h35
  text "GND" at 785,4425 h35
  text "GND" at 3485,4425 h35
  text "PE11" at 3150,4420 h35
  text "PD7" at 455,4325 h35
  text "PG9" at 785,4325 h35
  text "PD15" at 3150,4325 h35
  text "PD14" at 3485,4325 h35
  text "USB" at 175,4275 h40
  text "PG10" at 455,4225 h35
  text "PG11" at 785,4225 h35
  text "PE9" at 3150,4225 h35
  text "PE10" at 3485,4225 h35
  text "QST" at 3910,4175 h40 r90
  text "PG12" at 455,4125 h35
  text "PG13" at 785,4125 h35
  text "PE7" at 3150,4125 h35
  text "PE8" at 3485,4125 h35
  text "PG14" at 450,4025 h35
  text "PG15" at 785,4025 h35
  text "PG1" at 3150,4025 h35
  text "GND" at 450,3925 h35
  text "PB3" at 785,3925 h35
  text "GND" at 3150,3925 h35
  text "PG0" at 3485,3925 h35
  text "PB4" at 450,3825 h35
  text "PB5" at 785,3825 h35
  text "PF14" at 3150,3825 h35
  text "PF15" at 3485,3825 h35
  text "TRACE" at 3780,3775 h40 r90
  text "1" at 4175,3770 h35 r90
  text "PB6" at 450,3725 h35
  text "PB7" at 785,3725 h35
  text "PF12" at 3150,3725 h35
  text "PF13" at 3485,3725 h35
  text "USART2" at 70,3655 h40
  text "PB8" at 450,3625 h35
  text "PB9" at 785,3625 h35
  text "PB2" at 3165,3625 h35
  text "PF11" at 3485,3625 h35
  text "PE0" at 450,3525 h35
  text "3V3" at 785,3525 h35
  text "Pin1" at 1340,3525 h30
  text "PB1" at 3165,3525 h35
  text "D5V" at 450,3425 h35
  text "GND" at 785,3425 h35
  text "GND" at 3485,3425 h35
  text "1" at 3095,3365 h40 r90
  text "PE4" at 450,3325 h35
  text "PE3" at 785,3325 h35
  text "PB0" at 3165,3325 h35
  text "PC5" at 3490,3325 h35
  text "JTAG" at 3910,3295 h40 r90
  text "VREF" at 2325,3255 h35
  text "PE6" at 450,3225 h35
  text "PE5" at 785,3225 h35
  text "PC4" at 3165,3225 h35
  text "PA7" at 3485,3225 h35
  text "0" at 3095,3165 h40 r90
  text "PC14" at 450,3125 h35
  text "PC13" at 785,3125 h35
  text "PA6" at 3165,3125 h35
  text "PA5" at 3485,3125 h35
  text "Temp" at 1365,3040 h35
  text "PF0" at 450,3025 h35
  text "PC15" at 785,3025 h35
  text "PA4" at 3165,3025 h35
  text "PA3" at 3485,3025 h35
  text "1" at 2475,2985 h40
  text "0" at 2590,2985 h40
  text "BOOT" at 2750,2985 h40
  text "GND" at 450,2925 h35
  text "PF1" at 785,2925 h35
  text "GND" at 3165,2925 h35
  text "PA2" at 3485,2925 h35
  text "X" at 2475,2915 h40
  text "0" at 2590,2915 h40
  text "User  Flash" at 2685,2915 h40
  text "MCU_3V3" at 2075,2900 h35
  text "USB: USB 5V power source" at 1115,2870 h36
  text "0" at 2475,2845 h40
  text "1" at 2595,2845 h40
  text "System memory" at 2685,2845 h40
  text "PF2" at 450,2825 h35
  text "PF3" at 785,2825 h35
  text "PA1" at 3165,2825 h35
  text "DTB: Daughter Board power source" at 1115,2820 h36
  text "1" at 2480,2775 h40
  text "1" at 2595,2775 h40
  text "SRAM" at 2685,2775 h40
  text "PSU: Power Supply Unit" at 1115,2765 h36
  text "5V" at 927.02,2747.98 h35
  text "3V3" at 2325,2735 h35
  text "PF4" at 450,2725 h35
  text "PF5" at 785,2725 h35
  text "PC3" at 3165,2725 h35
  text "PC2" at 3485,2725 h35
  text "LIN" at 2160,2680 h35
  text "PF6" at 450,2625 h35
  text "PF7" at 785,2625 h35
  text "PC1" at 3165,2625 h35
  text "PC0" at 3485,2625 h35
  text "PSU" at 1275,2615 h35 r90
  text "USB" at 1075,2610 h35 r90
  text "DTB" at 1175,2610 h35 r90
  text "MCKO" at 2420,2580 h35 r90
  text "HPR" at 2620,2575 h35 r90
  text "PF8" at 450,2525 h35
  text "PF9" at 785,2525 h35
  text "PF10" at 3165,2520 h35
  text "RIN" at 2160,2510 h35
  text "3V3" at 450,2430 h35
  text "GND" at 785,2425 h35
  text "3V3" at 3165,2425 h35
  text "GND" at 3485,2425 h35
  text "1" at 4175,2420 h35 r90
  text "OFF" at 1710,2400 h35 r90
  text "MCKI" at 1885,2400 h35 r90
  text "CMDVCC" at 1535,2390 h35 r90
  text "HPL" at 2290,2355 h35
  text "MCO" at 2480,2355 h35
  text "USART1" at 75,2350 h40
  text "69" at 600,2345 h35
  text "70" at 700,2345 h35
  text "USB disconnect" at 1355,2345 h35 r90
  text "1" at 1415,2345 h35
  text "69" at 3300,2345 h35
  text "70" at 3400,2345 h35
  text "RST" at 2649.14,2340 h35
  text "MC_PFC" at 2770,2340 h35
  text "Smart Card" at 1530,2335 h40
  text "1" at 1940,2325 h35
  text "S" at -125,1995 h50 r90
  text "D" at -15,1995 h50 r90
  text "MSD" at 3600,1750 h40 r90
  text "Audio JACK" at 3675,1390 h40 r90
  text "IrDA_RX" at 3760,1325 h35
  text "IrDA" at 4250,900 h40 r90
  text "PF9 . . PF6" at 1820,520 h40
  text "-" at 360,505 h40
  text "AUX2" at 685,460 h35
  text "AUX1" at 880,460 h35
  text "+" at 355,325 h40
  text "D" at 3560,320 h45
  text "PSU" at 260,210 h40
  text "ADC12_14" at 3690,170 h35
  text "DC5V" at 260,145 h40
  text "GND" at 230,-125 h35
BottomOverlay:
  drawing of 798 lines, arcs and shapes, not listed
  text "D" at 1365,5300 h45
  text "B" at -125,2650 h50 r90
  text "D" at -15,2650 h50 r90
  text "Smart Card" at 2495,1225 h40
  text "NC" at 2030,1070 h35 r270
  text "CLK" at 2125,1070 h35 r270
  text "RST" at 2225,1070 h35 r270
  text "VCC" at 2325,1070 h35 r270
  text "NC" at 2025,-185 h35 r270
  text "I/O" at 2125,-185 h35 r270
  text "NC" at 2225,-185 h35 r270
  text "GND" at 2325,-185 h35 r270
Mechanical1:
  lines w5: -225,-225 4275,-225 4275,1870 cw(c5430.29,2115.57) 4275,2361.13 4275,6575 -225,6575 -225,-225

## Text inside footprints (layer, text, board x,y; h text height)
CN7: TopOverlay "1" at 3925,3250 h35 r90
U14: TopOverlay "+" at 2435,1475 h60; TopOverlay "-" at 2920,1475 h60